# EAGLE board dcdr (EAGLE 7.7.0)
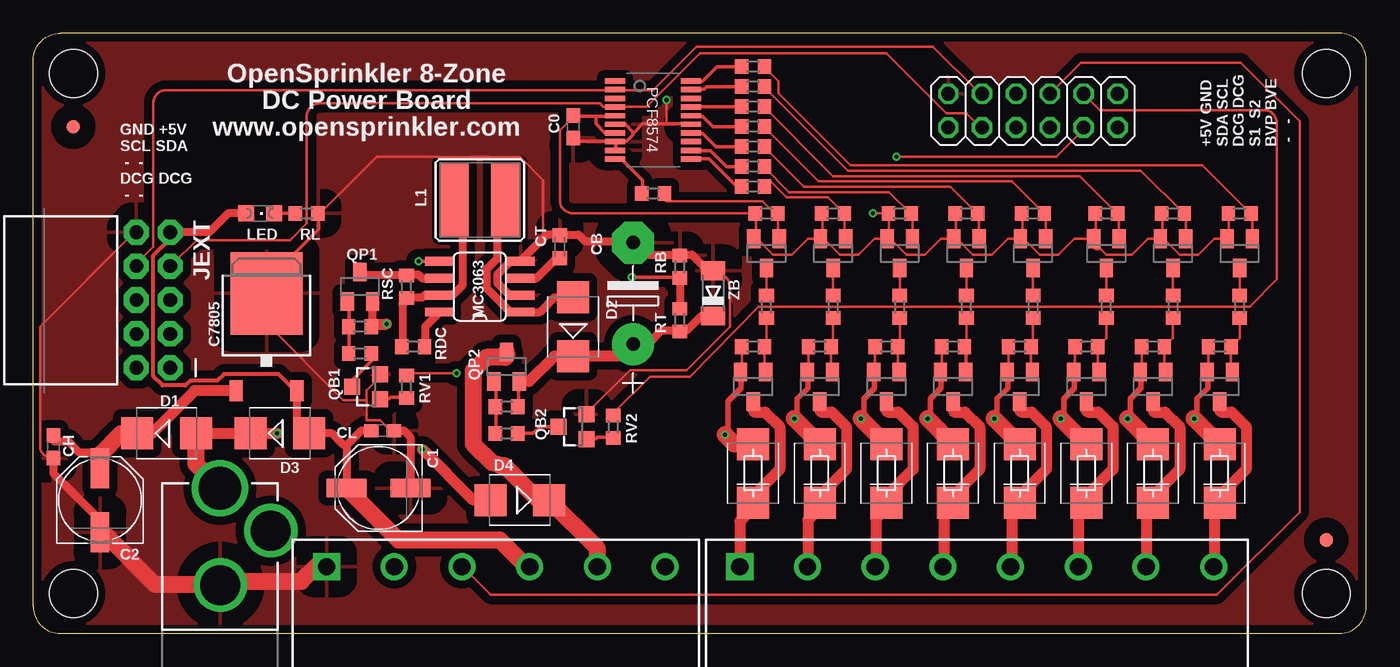
[diagram p0: board, top side]
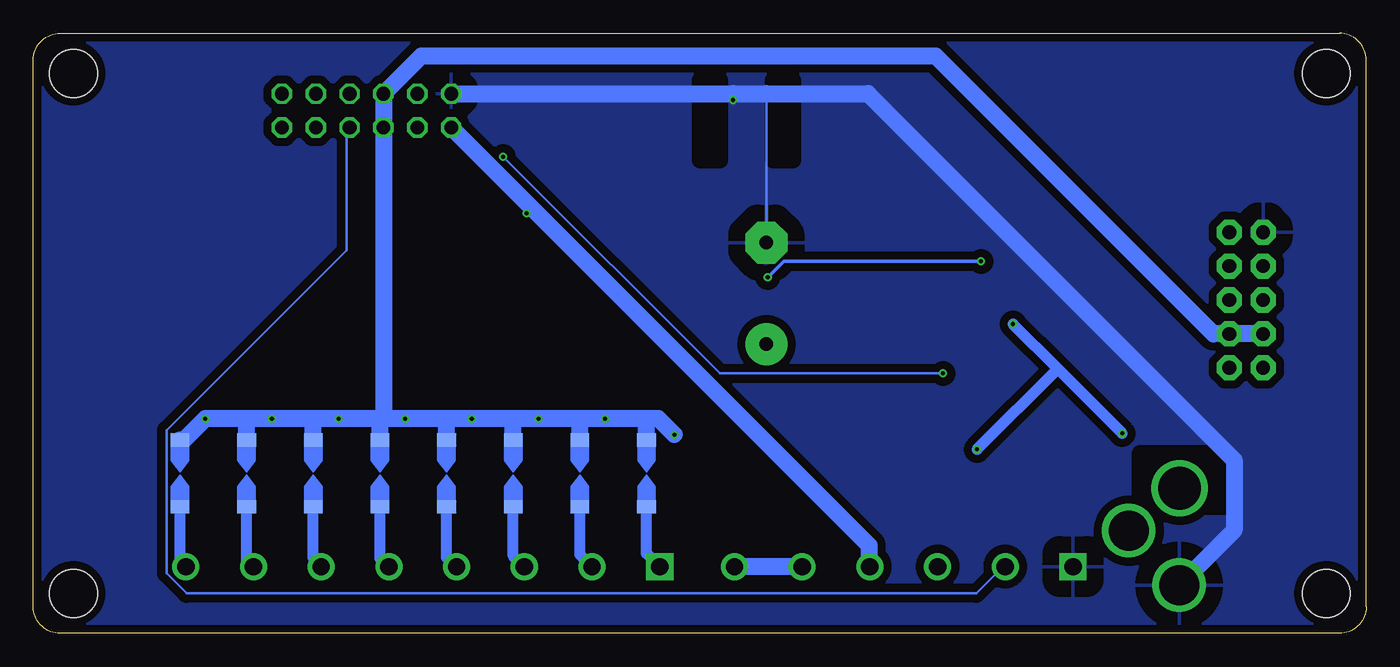
[diagram p1: board, bottom side, seen from below]

Size 100 x 45 mm. Coordinates in mm from the lower left corner, seen from the top.
Outline: 2,0 98,0 arc90 100,2 100,43 arc90 98,45 2,45 arc90 0,43 0,2 arc90 2,0
Copper layers (1*16): Top 0.035mm / dielectric 1.5mm / Bottom 0.035mm
Design rules "Fusion_eagle_rule_v1.1 *": minimum track width 6mil, minimum drill 12mil, track to track 6mil, track to pad 6mil, pad to pad 6mil, via to via 6mil, smd to smd 0mil, copper to edge 10mil, drill to drill 10mil, minimum pad ring 10mil, minimum via ring 6mil, stop-mask expansion 2mil, vias tented up to drill 100mil, thermal gap 50mil
Net classes: 0 default: width 0.203 mm, clearance 0.178 mm; 1 power: width 0.203 mm, clearance 0.178 mm; 2 relaypower: width 0.508 mm, clearance 0.508 mm
Holes 3.6 mm at 3,3 97,3 3,42 97,42
bRestrict: area 10.5,9.5 to 17,13.5; area 43,35.5 to 44.5,41.5; area 48.5,35.5 to 50,41.5

## Footprints (pad centres in the part's own frame; a part is rotated, then mirrored left to right if it is on the bottom)
C0603 = smd 1.1 x 1: 1 -0.85,0; 2 0.85,0
PANASONIC_D = smd 3 x 1.4: + 2.4,0; - -2.4,0
TO252 = smd 1 x 1.6: 1 -2.28,-4.8; 2 2.28,-4.8 | smd 5.4 x 6.2: 3 0,2.5
E7,5-16 = drill 1.016 pad 3.15: + -3.81,0 | drill 1.016 pad 3.15 octagon: - 3.81,0
C0603K = smd 1.05 x 1.08: 1 -0.875,0; 2 0.875,0
SMB = smd 2.4 x 2.4: A 2.2,0; C -2.2,0
POWER_JACK_PTH_LOCK = drill 2.997: GND 0.025,6.608; GNDBREAK 3.812,10.7 | drill 3.2: PWR 0,13.878
SCREWTERMINAL-5MM-6 = drill 1.3 pad 2.032 square: 1 0,0 | drill 1.3 pad 2.032: 2 5.08,0; 3 10.16,0; 4 15.24,0; 5 20.32,0; 6 25.4,0
2X06 = drill 1.016 octagon: 1 -6.35,-1.27; 2 -6.35,1.27; 3 -3.81,-1.27; 4 -3.81,1.27; 5 -1.27,-1.27; 6 -1.27,1.27; 7 1.27,-1.27; 8 1.27,1.27; 9 3.81,-1.27; 10 3.81,1.27; 11 6.35,-1.27; 12 6.35,1.27
2X5-RAF = drill 1.016 pad 1.88 octagon: 1 -1.27,5.08; 2 1.27,5.08; 3 -1.27,2.54; 4 1.27,2.54; 5 -1.27,0; 6 1.27,0; 7 -1.27,-2.54; 8 1.27,-2.54; 9 -1.27,-5.08; 10 1.27,-5.08
CR54 = smd 5.5 x 2.15: P$1 0,1.92; P$2 0,-1.92
CHIPLED_0805 = smd 1.2 x 1.2: A 0,-1.05; C 0,1.05
SO08 = smd 0.66 x 2.032: 1 -1.905,-3.073; 2 -0.635,-3.073; 3 0.635,-3.073; 4 1.905,-3.073; 5 1.905,3.073; 6 0.635,3.073; 7 -0.635,3.073; 8 -1.905,3.073
SSOP20 = smd 0.4 x 1.5: 1 -2.925,-2.85; 2 -2.275,-2.85; 3 -1.625,-2.85; 4 -0.975,-2.85; 5 -0.325,-2.85; 6 0.325,-2.85; 7 0.975,-2.85; 8 1.625,-2.85; 9 2.275,-2.85; 10 2.925,-2.85; 11 2.925,2.85; 12 2.275,2.85; 13 1.625,2.85; 14 0.975,2.85; 15 0.325,2.85; 16 -0.325,2.85; 17 -0.975,2.85; 18 -1.625,2.85; 19 -2.275,2.85; 20 -2.925,2.85
SOT23 = smd 1 x 1.4: 1 -0.95,-1.1; 2 0.95,-1.1; 3 0,1.1
SOT23-3 = smd 1.2 x 1.2: 1 -0.95,-1; 2 0.95,-1; 3 0,1.1
R0603 = smd 1 x 1.1: 1 -0.85,0; 2 0.85,0
SCREWTERMINAL-5MM-8 = drill 1.3 pad 2.032 square: 1 0,0 | drill 1.3 pad 2.032: 2 5.08,0; 3 10.16,0; 4 15.24,0; 5 20.32,0; 6 25.4,0; 7 30.48,0; 8 35.56,0
PCB-SGAP = smd 1 x 1.4 bottom: 1 -2.5,0; 2 2.5,0
FIDUCIAL_1MM = smd 1 x 1: 1 0,0
MINIMELF = smd 1.4 x 1.8: A 1.7,0; C -1.7,0

## Placement (x,y rotation side)
C0  0.1u  [C0603]  40.5,38 270 top
C1  100uF  [PANASONIC_D]  25.9,10.9 180 top
C2  100uF  [PANASONIC_D]  5,10 90 top
C7805  [TO252]  17.5,23 0 top
CB  2200uF  [E7,5-16]  45,25.5 90 top
CH  0.1u  [C0603]  1.5,14 270 top
CL  0.1u  [C0603]  26.2,15.2 0 top
CT  470  [C0603K]  39.5,29 90 top
D1  SS34  [SMB]  10,15 0 top
D2  SS34  [SMB]  40.5,23 90 top
D3  SS34  [SMB]  18.5,15 0 top
D4  SS34  [SMB]  36.5,10 180 top
J1  POWER_JACK  [POWER_JACK_PTH_LOCK]  14,-3 0 top
JCOM  [SCREWTERMINAL-5MM-6]  22,5 0 top
JCON  [2X06]  75,39.2 0 top
JEXT  M05X2RAF  [2X5-RAF]  9,25 180 top
L1  220uH  [CR54]  33.5,32.5 90 top
LED  GREEN  [CHIPLED_0805]  17,31.5 270 top
MC3063  [SO08]  33.5,26 90 top
PCF8574  PCF8574  [SSOP20]  46.5,38.5 270 top
Q1  BSS84  [SOT23]  55,28.5 180 top
Q2  BSS84  [SOT23]  60,28.5 180 top
Q3  BSS84  [SOT23]  65,28.5 180 top
Q4  BSS84  [SOT23]  70,28.5 180 top
Q5  BSS84  [SOT23]  75,28.5 180 top
Q6  BSS84  [SOT23]  80.5,28.5 180 top
Q7  BSS84  [SOT23]  85.5,28.5 180 top
Q8  BSS84  [SOT23]  90.5,28.5 180 top
QB1  3904  [SOT23-3]  25,18.5 90 top
QB2  3904  [SOT23-3]  40.5,15.5 90 top
QP1  BSS84  [SOT23]  24.5,26 0 top
QP2  BSS84  [SOT23]  35.5,20 0 top
RB  4.7K  [R0603]  48.5,27.5 90 top
RB1  470K  [R0603]  54,21.5 0 top
RB2  470K  [R0603]  59,21.5 0 top
RB3  470K  [R0603]  64,21.5 0 top
RB4  470K  [R0603]  69,21.5 0 top
RB5  470K  [R0603]  74,21.5 0 top
RB6  470K  [R0603]  79,21.5 0 top
RB7  470K  [R0603]  84,21.5 0 top
RB8  470K  [R0603]  89,21.5 0 top
RDC  180  [R0603]  28.5,21.5 0 top
RL  1K  [R0603]  20.5,31.5 0 top
RP1  100K  [R0603]  24.5,23 180 top
RP2  100K  [R0603]  35.5,17 180 top
RQ1  10K  [R0603]  46.5,33 180 top
RQ2  10K  [R0603]  54,33.5 180 top
RQ3  10K  [R0603]  54,35 180 top
RQ4  10K  [R0603]  54,36.5 180 top
RQ5  10K  [R0603]  54,38 180 top
RQ6  10K  [R0603]  54,39.5 180 top
RQ7  10K  [R0603]  54,41 180 top
RQ8  10K  [R0603]  54,42.5 180 top
RS1  100K  [R0603]  24.5,21 0 top
RS2  100K  [R0603]  35.5,15 0 top
RSC  3.3  [R0603]  28,26 90 top
RT  75K  [R0603]  48.5,23.5 90 top
RT1  1K  [R0603]  55,24.5 90 top
RT2  1K  [R0603]  60,24.5 90 top
RT3  1K  [R0603]  65,24.5 90 top
RT4  1K  [R0603]  70,24.5 90 top
RT5  1K  [R0603]  75,24.5 90 top
RT6  1K  [R0603]  80.5,24.5 90 top
RT7  1K  [R0603]  85.5,24.5 90 top
RT8  1K  [R0603]  90.5,24.5 90 top
RU1  470K  [R0603]  55,31.5 0 top
RU2  470K  [R0603]  60,31.5 0 top
RU3  470K  [R0603]  65,31.5 0 top
RU4  470K  [R0603]  70,31.5 0 top
RU5  470K  [R0603]  75,31.5 0 top
RU6  470K  [R0603]  80.5,31.5 0 top
RU7  470K  [R0603]  85.5,31.5 0 top
RU8  470K  [R0603]  90.5,31.5 0 top
RV1  1K  [R0603]  28,18.5 270 top
RV2  1K  [R0603]  43.5,15.5 270 top
S02  [SCREWTERMINAL-5MM-8]  53,5 0 top
SP1  PCB-SGAP  [PCB-SGAP]  54,12 270 top
SP2  PCB-SGAP  [PCB-SGAP]  59,12 270 top
SP3  PCB-SGAP  [PCB-SGAP]  64,12 270 top
SP4  PCB-SGAP  [PCB-SGAP]  69,12 270 top
SP5  PCB-SGAP  [PCB-SGAP]  74,12 270 top
SP6  PCB-SGAP  [PCB-SGAP]  79,12 270 top
SP7  PCB-SGAP  [PCB-SGAP]  84,12 270 top
SP8  PCB-SGAP  [PCB-SGAP]  89,12 270 top
T1  AP3400  [SOT23]  54,18.5 180 top
T2  BSS123  [SOT23]  59,18.5 180 top
T3  BSS123  [SOT23]  64,18.5 180 top
T4  BSS123  [SOT23]  69,18.5 180 top
T5  BSS123  [SOT23]  74,18.5 180 top
T6  BSS123  [SOT23]  79,18.5 180 top
T7  BSS123  [SOT23]  84,18.5 180 top
T8  BSS123  [SOT23]  89,18.5 180 top
TVS1  SMBJ24A  [SMB]  54,12 270 top
TVS2  TVSSMB  [SMB]  59,12 270 top
TVS3  TVSSMB  [SMB]  64,12 270 top
TVS4  TVSSMB  [SMB]  69,12 270 top
TVS5  TVSSMB  [SMB]  74,12 270 top
TVS6  TVSSMB  [SMB]  79,12 270 top
TVS7  TVSSMB  [SMB]  84,12 270 top
TVS8  TVSSMB  [SMB]  89,12 270 top
U$1  FIDUCIAL  [FIDUCIAL_1MM]  3,38 0 top
U$2  FIDUCIAL  [FIDUCIAL_1MM]  97,7 0 top
ZB  24V  [MINIMELF]  51,25.5 90 top

## Library data of the parts
C0 CH CL CT LED MC3063 = adafruit
C1 C2 = resistor
C7805 = linear
CB RB1-RB8 RQ1-RQ8 RT1-RT8 RU1-RU8 = rcl
D1-D4 ZB = diode
J1 JCOM S02 = SparkFun
JCON = pinhead
JEXT L1 PCF8574 QB1 QB2 TVS1-TVS8 = SparkFunNew
Q1-Q8 QP1 QP2 T1-T8 = transistor-small-signal
RB RDC RP1 RP2 RS1 RS2 RSC RT RV1 RV2 U$1 U$2 = adafruitGood
RL = adafruit2013
SP1-SP8 = varistor

## Nets
BOOST_V: CB.+ D2.C QP2.2 RP2.1 RT.1 ZB.C
BPE: JCON.9 RV1.1
BVE: JCON.10 RV2.1
COM [power]: D4.C JCOM.5 JCOM.6 QP2.3
DCIN_PRE: D1.A D3.C D4.A J1.PWR QP1.2 RP1.1
DCRET: JCON.5 JCON.6 JEXT.3 JEXT.4 RB1.1 RB2.1 RB3.1 RB4.1 RB5.1 RB6.1 RB7.1 RB8.1 SP1.1 SP2.1 SP3.1 SP4.1 SP5.1 SP6.1 SP7.1 SP8.1 T1.2 T2.2 T3.2 T4.2 T5.2 T6.2 T7.2 T8.2 TVS1.C TVS2.C TVS3.C TVS4.C TVS5.C TVS6.C TVS7.C TVS8.C
GND [power]: C0.2 C1.- C2.- C7805.3 CB.- CH.2 CL.2 CT.2 J1.GND JCOM.1 JCON.2 JEXT.10 MC3063.2 MC3063.4 PCF8574.6 PCF8574.8 PCF8574.9 PCF8574.15 QB1.2 QB2.2 RB.2 RL.2 ZB.A
N$1: D2.A L1.P$2 MC3063.1
N$2: Q1.3 RT1.2
N$3: Q2.3 RT2.2
N$4: Q3.3 RT3.2
N$5: Q4.3 RT4.2
N$6: Q5.3 RT5.2
N$7: Q6.3 RT6.2
N$8: RB1.2 RT1.1 T1.1
N$9: RB2.2 RT2.1 T2.1
N$10: Q7.3 RT7.2
N$11: Q8.3 RT8.2
N$12: Q1.1 RQ1.1 RU1.2
N$13: Q2.1 RQ2.1 RU2.2
N$14: Q3.1 RQ3.1 RU3.2
N$15: RB3.2 RT3.1 T3.1
N$16: RB4.2 RT4.1 T4.1
N$17: CT.1 MC3063.3
N$18: RB5.2 RT5.1 T5.1
N$19: RB6.2 RT6.1 T6.1
N$20: Q4.1 RQ4.1 RU4.2
N$21: RB7.2 RT7.1 T7.1
N$22: RB8.2 RT8.1 T8.1
N$23: Q5.1 RQ5.1 RU5.2
N$24: MC3063.8 RDC.2
N$25: Q6.1 RQ6.1 RU6.2
N$26: L1.P$1 MC3063.7 RDC.1 RSC.1
N$27: MC3063.6 QP1.3 RSC.2
N$28: LED.C RL.1
N$29: MC3063.5 RB.1 RT.2
N$30: QP1.1 RP1.2 RS1.1
N$31: Q7.1 RQ7.1 RU7.2
N$32: Q8.1 RQ8.1 RU8.2
N$33: QB1.1 RV1.2
N$34: QB2.3 RS2.2
N$35: QB1.3 RS1.2
N$38: QP2.1 RP2.2 RS2.1
N$43: QB2.1 RV2.2
N$50 [power]: S02.1 SP1.2 T1.3 TVS1.A
N$51 [power]: S02.2 SP2.2 T2.3 TVS2.A
N$52 [power]: S02.3 SP3.2 T3.3 TVS3.A
N$53 [power]: S02.4 SP4.2 T4.3 TVS4.A
N$54 [power]: S02.5 SP5.2 T5.3 TVS5.A
N$55 [power]: S02.6 SP6.2 T6.3 TVS6.A
N$56 [power]: S02.7 SP7.2 T7.3 TVS7.A
N$57 [power]: S02.8 SP8.2 T8.3 TVS8.A
P0: PCF8574.10 RQ1.2
P1: PCF8574.11 RQ2.2
P2: PCF8574.12 RQ3.2
P3: PCF8574.14 RQ4.2
P4: PCF8574.16 RQ5.2
P5: PCF8574.17 RQ6.2
P6: PCF8574.19 RQ7.2
P7: PCF8574.20 RQ8.2
RECDC: C2.+ C7805.1 CH.1 D1.C
S1: JCOM.2 JCON.7
S2: JCOM.3 JCON.8
SCL: JCON.4 JEXT.8 PCF8574.2
SDA: JCON.3 JEXT.7 PCF8574.4
VIN [power]: C0.1 C1.+ C7805.2 CL.1 D3.A JCOM.4 JCON.1 JEXT.9 LED.A PCF8574.5 PCF8574.7 Q1.2 Q2.2 Q3.2 Q4.2 Q5.2 Q6.2 Q7.2 Q8.2 RU1.1 RU2.1 RU3.1 RU4.1 RU5.1 RU6.1 RU7.1 RU8.1

## Tracks (layer width: path | path; a pad name or v marks a point on that pad's centre or on a via)
BOOST_V
  Top 0.254: RP2.1 36.4,17 36.4,18.2 36.5,18.3 36.5,18.5 QP2.2
  Top 0.61: ZB.C 50.1,23.8 49,22.7 48.5,22.7 RT.1 48.2,22.7 47.1,22.7 46.1,21.7 CB.+
  Top 0.813: CB.+ 44.7,21.6 43.9,20.8 D2.C 39.1,20.8 37.2,18.9 QP2.2
BPE  (via drill 0.3)
  Top 0.203: v31.75,19.5 28,19.5 RV1.1 | v64.75,35.75 76.75,35.75 78.75,37.75 JCON.9
  Bottom 0.203: v31.75,19.5 48.5,19.5 v64.75,35.75
BVE
  Top 0.203: RV2.1 43.5,16.5 46.25,19.25 49.25,19.25 54.4,24.5 91.25,24.5 93.3,26.55 93.3,38.25 arc90 92.3,39.25 80,39.25 79,40.25 JCON.10
COM
  Top 1.27: JCOM.5 42.32,6.38 D4.C 37.9,10 35.3,12.6 35,12.6 34.4,12.8 33,14.2 33,19.7 34,20.7 35.4,20.7 35.5,20.8 QP2.3
  Bottom 1.27: JCOM.5 JCOM.6
DCIN_PRE  (via drill 0.3)
  Top 0.61: RP1.1 25.4,23 25.4,24.2 25.5,24.3 25.5,24.9 QP1.2
  Top 0.813: D1.A D3.C v18.3,15 | v26.5,23.2 25.7,23.2 RP1.1 | v29.2,13.8 33,10 D4.A
  Top 1.27: D1.A 12.2,12.7 14,10.9 J1.PWR
  Bottom 0.813: v18.3,15 23.15,19.85 | 23.15,19.85 v26.5,23.2 | v29.2,13.8 23.15,19.85
DCRET  (via drill 0.3)
  Top 0.203: RB2.1 58.15,19.7 T2.2 | RB3.1 63.15,19.7 T3.2 | RB4.1 68.15,19.7 T4.2 | RB5.1 73.15,19.7 T5.2 | RB6.1 78.15,19.7 T6.2 | RB7.1 83.15,19.7 T7.2 | RB8.1 88.15,19.7 T8.2 | RB1.1 53.15,19.7 T1.2
  Top 0.406: v51.9,14.9 52.1,15.5 52.1,17.4 53.1,18.4 53.1,19.6 T1.2 | v57.1,16.1 57.3,16.7 57.3,17.6 58.1,18.4 58.1,19.6 T2.2 | v62.1,16.1 62.3,16.7 62.3,17.6 63.1,18.4 63.1,19.6 T3.2 | v67.1,16.1 67.3,16.7 67.3,17.6 68.1,18.4 68.1,19.6 T4.2 | v72.1,16.1 72.3,16.7 72.3,17.6 73.1,18.4 73.1,19.6 T5.2 | v77.1,16.1 77.3,16.7 77.3,17.6 78.1,18.4 78.1,19.6 T6.2 | v82.1,16.1 82.3,16.7 82.3,17.6 83.1,18.4 83.1,19.6 T7.2 | v87.1,16.1 87.3,16.7 87.3,17.6 88.1,18.4 88.1,19.6 T8.2
  Top 1.27: v57.1,16.1 TVS2.C | v51.9,14.9 52.6,14.2 TVS1.C | v62.1,16.1 TVS3.C | v67.1,16.1 TVS4.C | v72.1,16.1 TVS5.C | v77.1,16.1 TVS6.C | v82.1,16.1 TVS7.C | v87.1,16.1 TVS8.C
  Bottom 1.27: 54,16.1 53.1,16.1 v51.9,14.9 | 54,16.1 v57.1,16.1 59,16.1 | 59,16.1 v62.1,16.1 63.8,16.1 | 63.8,16.1 v67.1,16.1 69.2,16.1 | 69.2,16.1 v72.1,16.1 73.8,16.1 | 73.8,16.1 74,16.1 | 74,16.1 v77.1,16.1 79.1,16.1 | 79.1,16.1 v82.1,16.1 83.9,16.1 | 83.9,16.1 v87.1,16.1 88.7,14.5 SP8.1 | SP1.1 54,16.1 | SP2.1 59,16.1 | SP3.1 64,15.9 63.8,16.1 | SP4.1 69,15.9 69.2,16.1 | SP5.1 74,16.1 | SP6.1 79,16 79.1,16.1 | SP7.1 84,16 83.9,16.1 | 73.8,16.1 73.73,16.17 JCON.5 JCON.6 70.9,43.3 32.3,43.3 11.46,22.46 JEXT.3 JEXT.4
GND  (via drill 0.3)
  Top 0.203: 25,17.5 25,16 26,16 26.75,15.25 CL.2 | 25,17.5 25,18.25 26,19.25 QB1.2 | 25,17.5 23.25,17.5 17.5,23.25 C7805.3 | QB2.2 41.5,16.5 44.75,19.75 49,19.75 52.25,23 52.25,26 arc90 51.25,27 51,27 ZB.A | RL.2 21.5,31.5 25.75,35.75 36.5,35.75 38.25,34 38.25,30 38.42,29.82 | JEXT.10 7.5,30 0.5,23 0.5,14 arc90 1.25,13.25 CH.2 | v47.5,40 47.5,38.2
  Top 0.254: C7805.3 17.5,26.4 21.4,30.3 21.4,31.5 RL.2 | C0.2 40.5,37 40.6,36.9 43.6,36.9 PCF8574.8 | PCF8574.9 43.7,36.3 43.7,36.8 PCF8574.8 | 45,37.6 45,37.4 44.5,36.9 43.9,36.9 43.8,36.8 PCF8574.8 | 45,37.6 44.4,38.2 43.7,38.2 PCF8574.6 | PCF8574.15 49.3,38.2 47.5,38.2 45.7,38.2 45.1,37.6 45,37.6
  Top 0.61: C2.- 5,8.5 1.5,12 CH.2 | C1.- 28.3,14.7 27.8,15.2 CL.2 | ZB.A 50.6,27.2 49.4,28.4 48.8,28.4 RB.2 48.5,28.4 46.1,28.4 45.3,29.2 CB.- 45,29.4 41.4,29.4 40.9,29.9 39.5,29.9 CT.2 39.2,29.9 38.5,29.9 38.42,29.82 36.6,28 MC3063.4 36.3,27.9 35.8,27.9 34.8,26.9 34.8,26.3 35.7,25.4 36.5,25.4 MC3063.2
  Top 1.27: C2.- 5.3,7.5 9.1,3.7 14,3.7 J1.GND 14.6,3.9 20.1,3.9 21.2,5 JCOM.1
  Bottom 0.203: v47.5,40 47.5,40.47 | 45,40.47 CB.-
  Bottom 1.27: JCON.2 47.5,40.47 45,40.47 37.37,40.47 9.9,13 9.9,7.73 J1.GND
  pour Top (isolate 0.61): 0,45 100,45 100,0 0,0
  pour Bottom (isolate 0.61): 0,45 100,45 100,0 0,0
N$1
  Top 0.61: L1.P$2 35.4,32.5 35.4,31.1 34.8,30.5 34.8,28.1 34,27.3 34,25.9 35.8,24.1 36.5,24.1 MC3063.1 36.8,24.1 38,24.1 39.1,25.2 D2.A
N$2
  Top 0.203: Q1.3 RT1.2
N$3
  Top 0.203: Q2.3 RT2.2
N$4
  Top 0.203: Q3.3 RT3.2
N$5
  Top 0.203: Q4.3 RT4.2
N$6
  Top 0.203: Q5.3 RT5.2
N$7
  Top 0.203: Q6.3 RT6.2
N$8
  Top 0.203: T1.1 54.85,19.7 RB1.2 55,21.65 RT1.1
N$9
  Top 0.203: RT2.1 60,21.65 RB2.2 59.85,19.7 T2.1
N$10
  Top 0.203: Q7.3 RT7.2
N$11
  Top 0.203: Q8.3 RT8.2
N$12
  Top 0.203: Q1.1 55.85,29.7 RU1.2 55.6,31.5 54.7,32.4 47.5,32.4 47.4,32.5 47.4,33 RQ1.1
N$13
  Top 0.203: Q2.1 60.85,29.7 RU2.2 60.8,31.5 59.6,32.7 56.5,32.7 55.3,33.9 55,33.9 54.9,33.8 54.9,33.5 RQ2.1
N$14
  Top 0.203: Q3.1 65.95,31.4 RU3.2 65.8,31.5 64.2,33.1 56.7,33.1 54.8,35 RQ3.1
N$15
  Top 0.203: RT3.1 65,21.65 RB3.2 64.85,19.7 T3.1
N$16
  Top 0.203: RT4.1 70,21.65 RB4.2
  Top 0.254: RB4.2 69.95,21.5 T4.1
N$17
  Top 0.61: CT.1 39.5,28.1 39.2,28.1 37.7,26.6 36.6,26.6 MC3063.3
N$18
  Top 0.203: RT5.1 75,21.65 RB5.2 74.85,19.7 T5.1
N$19
  Top 0.203: RT6.1 80.5,22.15 RB6.2 79.85,19.7 T6.1
N$20
  Top 0.203: Q4.1 70.95,31.4 RU4.2 70.8,31.5 68.8,33.5 57.8,33.5 54.8,36.5 RQ4.1
N$21
  Top 0.203: RT7.1 85.5,22.15 RB7.2 84.85,19.7 T7.1
N$22
  Top 0.203: RT8.1 90.5,22.15 RB8.2 89.85,19.7 T8.1
N$23
  Top 0.203: Q5.1 75.95,31.4 RU5.2 75.8,31.5 73.4,33.9 58.9,33.9 54.8,38 RQ5.1
N$24
  Top 0.61: RDC.2 29.4,21.5 29.4,23 30.4,24 MC3063.8
N$25
  Top 0.203: Q6.1 81.45,31.4 RU6.2 81.3,31.5 78.5,34.3 60,34.3 54.8,39.5 RQ6.1
N$26
  Top 0.61: RDC.1 27.7,21.5 27.7,24.7 27.9,24.9 RSC.1 28,25.2 29.2,25.2 29.4,25.4 30.4,25.4 MC3063.7 30.7,25.4 31.5,25.4 32.2,26.1 32.2,30.5 31.6,31.1 31.6,32.5 L1.P$1
N$27
  Top 0.61: QP1.3 24.5,27 24.6,26.9 28,26.9 RSC.2 28.3,26.9 28.9,26.9 29.2,26.6 30.4,26.6 MC3063.6
N$28
  Top 0.254: LED.C RL.1
N$29  (via drill 0.3)
  Top 0.254: v44.9,26.7 48.2,26.7 RB.1 | v28.9,27.9 30.4,27.9 MC3063.5
  Top 0.61: RB.1 RT.2
  Bottom 0.254: v28.9,27.9 43.7,27.9 v44.9,26.7
N$30
  Top 0.254: RS1.1 23.7,21 23.7,22.7 RP1.2 23.7,23.1 23.7,24.2 23.6,24.3 23.6,24.9 QP1.1
N$31
  Top 0.203: Q7.1 86.45,31.4 RU7.2 86.3,31.5 83.1,34.7 61.1,34.7 54.8,41 RQ7.1
N$32
  Top 0.203: Q8.1 91.45,31.4 RU8.2 91.3,31.5 87.7,35.1 61.3,35.1 55.9,40.5 55.9,41.4 54.8,42.5 RQ8.1
N$33
  Top 0.254: RV1.2 28,17.7 26.8,17.7 26.7,17.6 26,17.6 QB1.1
N$34
  Top 0.254: RS2.2 37.5,15 38,15.5 QB2.3
N$35
  Top 0.254: QB1.3 23.9,19 25.4,20.5 25.4,21 RS1.2
N$38
  Top 0.254: QP2.1 34.6,18.9 34.6,18.3 34.7,18.2 34.7,17 RP2.2 34.7,16.9 34.7,15 RS2.1
N$43
  Top 0.254: RV2.2 43.5,14.7 42.3,14.7 42.2,14.6 41.5,14.6 QB2.1
N$50
  Top 0.813: T1.3 54,16.7 54.1,16.6 54.9,16.6 56,15.5 56,12.3 54.1,10.4 54.1,10.2 TVS1.A 54,9.4 53,8.4 S02.1
  Bottom 0.813: SP1.2 54,6 S02.1
N$51
  Top 0.813: T2.3 59,16.7 59.1,16.6 59.9,16.6 61,15.5 61,12.3 59.1,10.4 59.1,10.2 TVS2.A 59,9.4 58.1,8.5 58.1,5 S02.2
  Bottom 0.813: SP2.2 59,5.9 58.1,5 S02.2
N$52
  Top 0.813: T3.3 64,16.7 64.1,16.6 64.9,16.6 66,15.5 66,12.3 64.1,10.4 64.1,10.2 TVS3.A 64,9.4 63.2,8.6 63.2,5 S02.3
  Bottom 0.813: SP3.2 64,5.8 63.2,5 S02.3
N$53
  Top 0.813: T4.3 69,16.7 69.1,16.6 69.9,16.6 71,15.5 71,12.3 69.1,10.4 69.1,10.2 TVS4.A 69,9.4 68.3,8.7 68.3,5 S02.4
  Bottom 0.813: SP4.2 69,5.7 68.3,5 S02.4
N$54
  Top 0.813: T5.3 74,16.7 74.1,16.6 74.9,16.6 76,15.5 76,12.3 74.1,10.4 74.1,10.2 TVS5.A 74,9.4 73.4,8.8 73.4,5 S02.5
  Bottom 0.813: SP5.2 74,5.6 73.4,5 S02.5
N$55
  Top 0.813: T6.3 79,16.7 79.1,16.6 79.9,16.6 81,15.5 81,12.3 79.1,10.4 79.1,10.2 TVS6.A 79,9.4 78.4,8.8 S02.6
  Bottom 0.813: SP6.2 79,5.6 S02.6
N$56
  Top 0.813: T7.3 84,16.7 84.1,16.6 84.9,16.6 86,15.5 86,12.3 84.1,10.4 84.1,10.2 TVS7.A 84,9.4 83.5,8.9 83.5,5 S02.7
  Bottom 0.813: SP7.2 84,5.5 83.5,5 S02.7
N$57
  Top 0.813: T8.3 89,16.7 89.1,16.6 89.9,16.6 91,15.5 91,12.3 89.1,10.4 89.1,10.2 TVS8.A 89,9.4 88.6,9 88.6,5 S02.8
  Bottom 0.813: SP8.2 89,5.4 88.6,5 S02.8
P0
  Top 0.254: RQ1.2 45.7,33 45.7,34 44.1,35.6 43.7,35.6 PCF8574.10
P1
  Top 0.254: RQ2.2 52.8,33.5 50.7,35.6 49.4,35.6 PCF8574.11
P2
  Top 0.254: RQ3.2 52,35 50.8,36.2 49.4,36.2 PCF8574.12
P3
  Top 0.254: RQ4.2 51.2,36.5 50.2,37.5 49.4,37.5 PCF8574.14
P4
  Top 0.254: RQ5.2 51,38 50.2,38.8 49.4,38.8 PCF8574.16
P5
  Top 0.254: RQ6.2 49.4,39.5 PCF8574.17
P6
  Top 0.254: RQ7.2 50.5,41 50.3,40.8 49.4,40.8 PCF8574.19
P7
  Top 0.254: RQ8.2 51.3,42.5 50.2,41.4 49.4,41.4 PCF8574.20
RECDC
  Top 0.61: CH.1 1.5,14.5 1.6,14.4 2.6,14.4 3.4,13.6 4.4,13.6 C2.+
  Top 0.813: D1.C 8.9,15 12.1,18.2 15.1,18.2 15.2,18.3 15.3,18.2 C7805.1
  Top 1.27: C2.+ 5,13.4 6.6,15 D1.C
S1
  Bottom 0.203: JCON.7 76.5,37.75 76.5,28.75 90,15.25 90,4.5 88.5,3 29.25,3 27.25,5 JCOM.2
S2
  Top 0.203: JCOM.3 arc-45 32.23,4.97 34.3,2.9 88.8,2.9 95,9.1 95,38.4 90.6,42.8 78.6,42.8 JCON.8
SCL
  Top 0.203: JCON.4 71,40.5 67.5,44 49.75,44 46.5,40.75 43.75,40.75 PCF8574.2 43.5,40.75 10,40.75 arc90 9,39.75 9,29 7.75,27.75 JEXT.8
SDA
  Top 0.203: JCON.3 71,38 70,39 68.5,39 64,43.5 50,43.5 46,39.5 43.75,39.5 PCF8574.4 43.5,39.5 42.75,39.5 42.5,39.75 21.5,39.75 arc90 20.5,38.75 20.5,30.75 19.25,29.5 12.25,29.5 10.5,27.75 JEXT.7
VIN  (via drill 0.3)
  Top 0.203: 54.15,29.7 Q1.2 | 59.15,29.7 Q2.2 | 64.15,29.7 Q3.2 | 69.05,31.4 RU4.1 69.1,31.4 69.2,31.3 69.2,30.3 69.1,30.2 69.1,29.8 Q4.2 | 74.05,31.4 RU5.1 74.1,31.4 74.2,31.3 74.2,30.3 74.1,30.2 74.1,29.8 Q5.2 | Q6.2 79.55,30.05 79.6,30.1 | 79.6,31.45 RU6.1 79.6,31.4 79.7,31.3 79.7,30.4 79.6,30.3 79.6,30.2 Q6.2 | 84.55,31.4 RU7.1 84.6,31.4 84.7,31.3 84.7,30.3 84.6,30.2 84.6,29.8 Q7.2 | 89.55,31.4 RU8.1 89.6,31.4 89.7,31.3 89.7,30.3 89.6,30.2 89.6,29.6 Q8.2 88.6,29.6 87.4,28.4 86,28.4 84.7,29.7 84.5,29.7 Q7.2 | Q2.2 58.1,29.6 56.9,28.4 55.5,28.4 54.2,29.7 Q1.2 | Q3.2 63.1,29.6 61.9,28.4 60.5,28.4 59.2,29.7 Q2.2 | Q4.2 68.1,29.6 66.9,28.4 65.5,28.4 64.2,29.7 Q3.2 | Q5.2 73.1,29.6 71.9,28.4 70.5,28.4 69.2,29.7 69,29.7 Q4.2 | Q6.2 78.1,29.6 76.9,28.4 75.5,28.4 74.2,29.7 74,29.7 Q5.2 | Q7.2 83.6,29.6 82.4,28.4 80.5,28.4 80.1,28.8 79.7,28.8 79.6,28.9 79.6,29.6 Q6.2 | Q1.2 54.1,29.7 54.1,30.2 54.2,30.3 54.2,31.5 RU1.1 40.5,31.5 arc-90 39.5,32.5 39.5,37.75 40.5,38.75 C0.1 | RU2.1 59.2,31.5 59.2,30.3 59.1,30.2 59.1,29.7 Q2.2 | Q3.2 64.1,29.7 64.1,30.2 64.2,30.3 64.2,31.5 RU3.1 v63,31.5
  Top 0.254: 42.2,38.8 40.5,38.8 C0.1 | 42.2,38.8 43.6,38.8 PCF8574.5 | 42.2,38.8 42.2,38.2 42.9,37.5 43.6,37.5 PCF8574.7
  Top 0.305: C7805.2 19.5,18.35 18.4,19.45 14.3,19.45 13.8,18.95 11.8,18.95 11.4,18.6 9.7,18.6 9,19.3 9,28.35 10.1,29.45 10.1,29.85 JEXT.9
  Top 0.61: 23.5,14.1 C1.+ | 23.5,14.1 24.6,15.2 CL.1 | LED.A 14.6,31.5 13.2,30.1 10.3,30.1 JEXT.9 | C7805.2 19.8,18.2 19.8,15.1 19.9,15 D3.A 22.4,15 23.2,14.2 23.5,14.1
  Top 1.27: JCOM.4 37,5 35,7 27.4,7 C1.+
  Bottom 0.203: v63,31.5 62.6,31.9
  Bottom 1.27: JCOM.4 37.3,5 37.3,6.6 62.6,31.9 68.6,37.9 JCON.1

## Text on the board
tNames: OpenSprinkler 8-Zone | DC Power Board | www.opensprinkler.com | +5V GND / SDA SCL / DCG DCG / S1 S2 / BVP BVE / - - | GND +5V / SCL SDA / - - / DCG DCG / - -